# Altium PCB Main.PcbDoc
Units mil, origin at the board's own origin, x right, y up, seen from the top; angles counter-clockwise.
Board outline 3410 x 1181.1 mil, 2 copper layers (Top Layer, Bottom Layer); 19 components, 19 nets, 78 pads, 4 vias.
Unrouted connection lines stored in the file: 16.
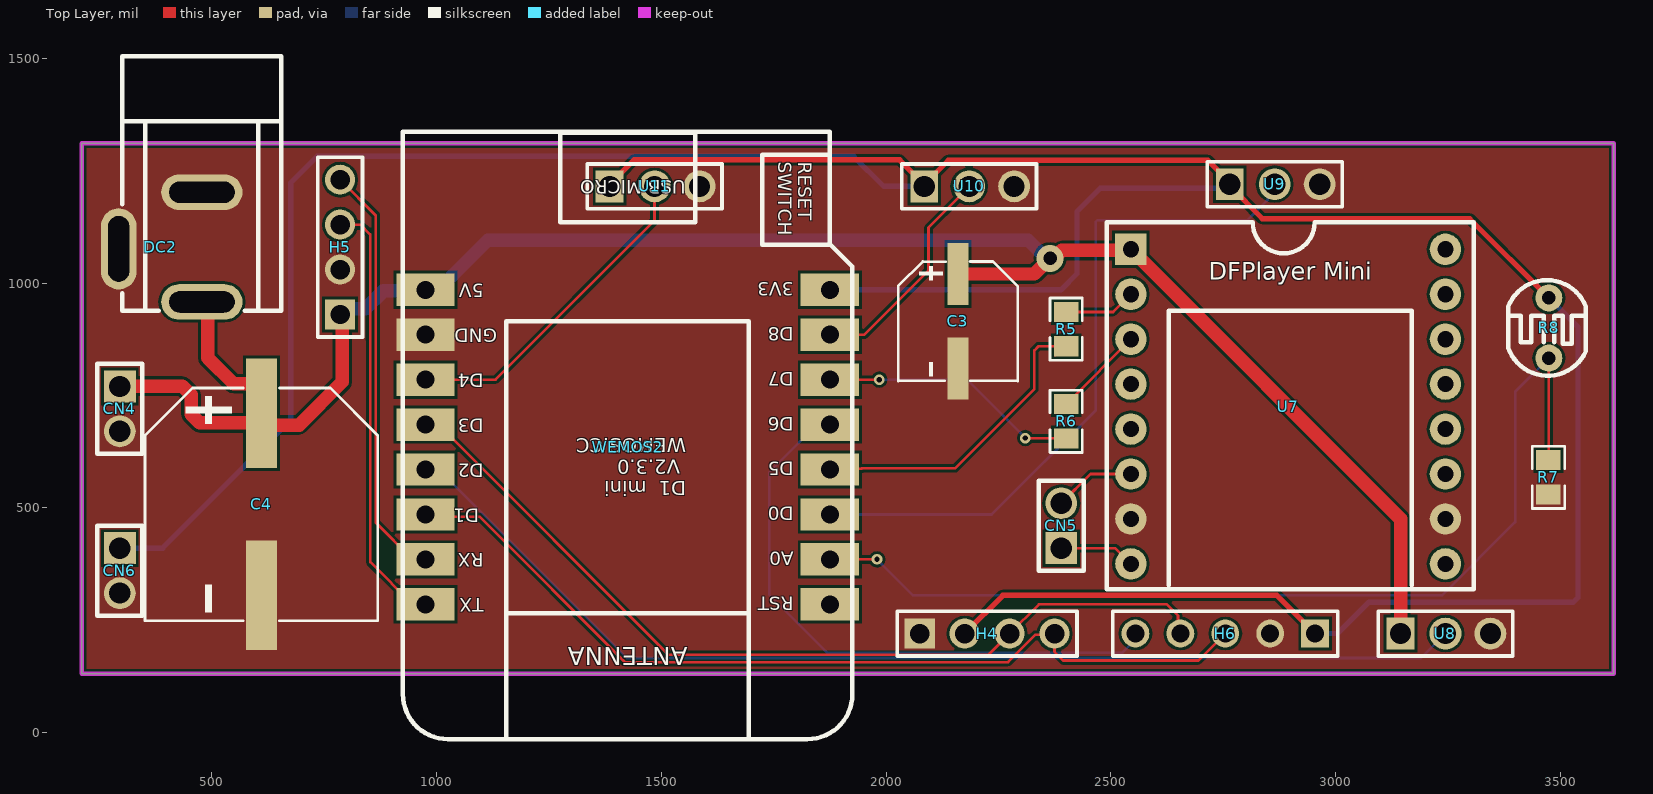
[diagram p0: Top Layer view]
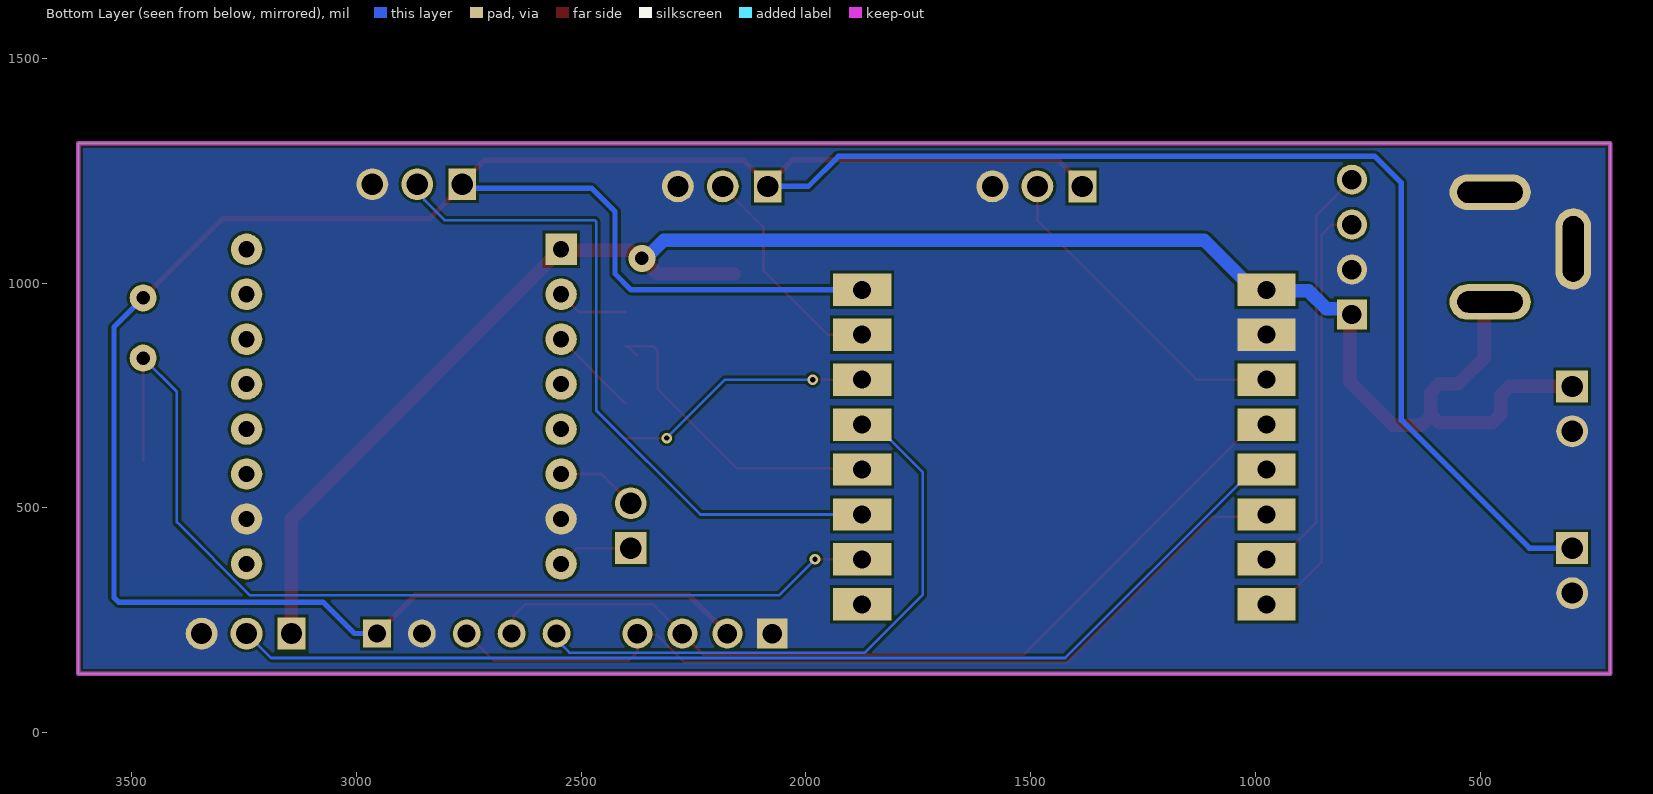
[diagram p1: Bottom Layer view, seen from below]

## Layer stack, top to bottom
Top Solder: solder mask 0.4, Solder Resist, Dk 3.5
Top Layer: signal copper 1.4
Dielectric 1: dielectric 12.6, FR-4, Dk 4.8
Bottom Layer: signal copper 1.4
Bottom Solder: solder mask 0.4, Solder Resist, Dk 3.5

## Board outline
210,130 210,1311.1 3620,1311.1 3620,130

## Design rules (kind name [scope] priority, off if disabled: settings)
Clearance [All] p1: gap=6 ignorepadtopadclearanceinfootprint=FALSE
HoleSize [All] p1: absolutevalues=TRUE maxlimit=150 minlimit=1 maxpercent=80.000 minpercent=20.000
PlaneClearance [All] p1: clearance=10
PlaneConnect [All] p1: planeconnectstyle=Direct reliefexpansion=20 reliefentries=4 reliefconductorwidth=10 reliefairgap=10
PolygonConnect [All] p1: connectstyle=Direct reliefconductorwidth=10 reliefentries=4 polygonreliefangle="90 Angle" airgapwidth=10
RoutingVias [All] p1: holewidth=19.68 width=39.37 viastyle="Through Hole" minholewidth=11.81 minwidth=23.62 maxholewidth=28 maxwidth=50
SilkToSilkClearance [All] p1: silktosilkclearance=2
SilkToSolderMaskClearance [IsPad] p1: minsilkscreentomaskgap=0 clearancetoexposedcopper=TRUE
SolderMaskExpansion [All] p1: expansion=4 istentingtop=FALSE
Width [All] p1: maxlimit=30 minlimit=6 preferedwidth=6
25 further rules are at their usual default settings.

## Classes and differential pairs
net class GND: GND

## Components (designator, comment, footprint, x,y, rotation, side; value= is the part's Value field where it differs from the comment)
C3 "100nF" CAP-SMD_BD6.3-L6.6-W6.6-LS7.2-FD 2160,915 r270 top
C4 "1000uF" 1000uf25v 323.09,812.17 r270 top
CN4 "5V输出" HDR-TH_2P-P2.54-V 295,720 r270 top
CN5 "喇叭1" HDR-TH_2P-P2.54-V 2390,460 r90 top
CN6 "3.3V输出" HDR-TH_2P-P2.54-V 295,360 r270 top
DC2 "总电源输入5V" DC-IN-TH_DC005 385,1080 r270 top
H4 "温湿度传感器" HDR-TH_4P-P2.54-V 2225,220 r0 top
H5 "树莓派" HDR-TH_4P-P2.54-V 785,1080 r90 top
H6 "手势感应" HDR-TH_5P-P2.54-V 2755,220 r180 top
R5 "1K" 0805_R 2375,895 r90 top
R6 "1K" 0805_R 2375,690 r90 top
R7 "1K" 0805_R 3500,570 r270 top
R8 "光敏GL5528" RES-TH_L5.1-W4.3-P3.40-D0.5 3475,900 r0 top
U7 "DFPlayer Mini" "DFPLAYER MINI" 2885,1135 r0 top
U8 "灯带矩阵8*32" HDR-TH_3P-P2.54-V 3245,220 r0 top
U9 "触摸按键1" HDR-TH_3P-P2.54-V 2865,1220 r0 top
U10 "触摸按键2" HDR-TH_3P-P2.54-V 2185,1215 r0 top
U11 "触摸按键3" HDR-TH_3P-P2.54-V 1485,1215 r0 top
WEMOS2 "WEMOS-D1-MINI" WEMOS_D1_MINI_V2.3.0 1425,635 r180 top

## Footprints (in the part's own frame and the unit in brackets; to place one, negate y for a bottom-side part, rotate by r counter-clockwise, add the part's x,y. Pads: shape width x height; smd on the part's side, far side on the other; paste and mask are expansions set on the pad)
0805_R [mil]
  rect 44.59x54.21 smd: 1(-35.71,-25.89) 2(40.38,-25.89)
  silkscreen extent -67,-62 72,10, body extent -39,-50 39,0, height 21
1000uf25v [mm]
  rect 6.2x1.75 smd: 1(2.592,7.287) 2(12.882,7.287)
  silkscreen extent 1.16,0.71 14.31,13.86, body extent 2.85,2.16 13.15,12.46, height 12.7
CAP-SMD_BD6.3-L6.6-W6.6-LS7.2-FD [mm]
  rect 3.5x1.2 smd: 1(-2.67,0) 2(2.67,0)
  silkscreen extent -3.38,-3.38 3.38,3.38, body extent -3.52,-3.3 3.78,3.3, height 5.9
DC-IN-TH_DC005 [mm]
  oval 2x4.6 hole 1.2 slot 3.7 at 90 deg: 1(3.1,2.35) 2(-3.1,2.35)
  oval 4.6x2 hole 1.2 slot 3.7 at 0 deg: 3(0.1,-2.35)
  silkscreen extent -10.8,-2.15 3.6,6.85
"DFPLAYER MINI" [mil]
  rect 70x70 hole 36: 1(-340,-60)
  round 70 hole 36: 2(-340,-160) 3(-340,-260) 4(-340,-360) 5(-340,-460) 6(-340,-560) 7(-340,-660) 8(-340,-760) 9(360,-760) 10(360,-660) 11(360,-560) 12(360,-460) 13(360,-360) 14(360,-260) 15(360,-160) 16(360,-60)
  silkscreen extent -394,-817 423,0, body extent -389,-820 410,0, height 335
HDR-TH_2P-P2.54-V [mm]
  rect 1.8x1.8 hole 1.2: 1(-1.27,0)
  round 1.8 hole 1.2: 2(1.27,0)
  silkscreen extent -2.54,-1.27 2.54,1.27, body extent -2.49,-1.27 2.59,1.27, height 8.54
HDR-TH_3P-P2.54-V [mm]
  rect 1.575x1.8 hole 1.2: 1(-2.54,0)
  round 1.8 hole 1.2: 2(0,0) 3(2.54,0)
  silkscreen extent -3.81,-1.27 3.81,1.27, body extent -3.81,-1.27 3.81,1.27, height 8
HDR-TH_4P-P2.54-V [mm]
  rect 1.7x1.7 hole 1.1: 1(-3.81,0)
  round 1.7 hole 1.1: 2(-1.27,0) 3(1.27,0) 4(3.81,0)
  silkscreen extent -5.08,-1.27 5.08,1.27, body extent -5.12,-1.26 5.04,1.28, height 9.39
HDR-TH_5P-P2.54-V [mil]
  rect 62x62 hole 40.16: 1(-200,0)
  round 62 hole 40.16: 2(-100,0) 3(0,0) 4(100,0) 5(200,0)
  silkscreen extent -250,-50 250,50, body extent -250,-49 250,51, height 398
RES-TH_L5.1-W4.3-P3.40-D0.5 [mil]
  round 60 hole 30: 1(0,66.93) 2(0,-66.93)
  silkscreen extent -91,-106 83,106
WEMOS_D1_MINI_V2.3.0 [mil]
  rect 129.6x72 hole 40: 3V3(-450,-350) 5V(450,-350) A0(-450,250) D0(-450,150) D1(450,150) D2(450,50) D3(450,-50) D4(450,-150) D5(-450,50) D6(-450,-50) D7(-450,-150) D8(-450,-250) GND(450,-250) RST(-450,350) RX(450,250) TX(450,350)
  silkscreen extent -500,-702 500,650, body extent -499,-410 499,410, height 335

## Part data
C3: BOM_Manufacturer="Taiyo Yuden", BOM_Manufacturer Part=UMK107B104KAHT, BOM_Supplier=LCSC, BOM_Supplier Part=C386152, Contributor=LCSC, nameAlias=Capacitance, spicePre=C, spiceSymbolName=UMK107B104KAHT
C4: BOM_Manufacturer=ValuePro, BOM_Manufacturer Part="1000uF 16V", BOM_Supplier=LCSC, BOM_Supplier Part=C43909, nameAlias=Capacitance, spicePre=C, spiceSymbolName="1000uF 16V"
CN4 CN5 CN6: BOM_Manufacturer="JST Sales America", BOM_Manufacturer Part=-, BOM_Supplier=LCSC, BOM_Supplier Part=C160332, Contributor=LCSC, spicePre=C, spiceSymbolName="RE-H022TD-1190 (LF)(SN)"
DC2: BOM_Manufacturer="Shenzhen Cankemeng", BOM_Manufacturer Part=-, BOM_Supplier=LCSC, BOM_Supplier Part=C132516, Contributor=LCSC, spicePre=D, spiceSymbolName="dc-005 5.5-2.0"
H4: library part i2C, BOM_Manufacturer=ZHENGLING, BOM_Manufacturer Part=Z-211-0411-0021-001, BOM_Supplier=LCSC, BOM_Supplier Part=C152150, Contributor=LCSC, spicePre=H, spiceSymbolName=Z-211-0411-0021-001
H5: BOM_Manufacturer=ZHENGLING, BOM_Manufacturer Part=Z-211-0411-0021-001, BOM_Supplier=LCSC, BOM_Supplier Part=C152150, Contributor=LCSC, spicePre=H, spiceSymbolName=Z-211-0411-0021-001
H6: BOM_Manufacturer="Amphenol ICC", BOM_Manufacturer Part=77311-462K05LF, BOM_Supplier=LCSC, BOM_Supplier Part=C180219, Contributor=LCSC, spicePre=H, spiceSymbolName=77311-462K05LF
R5 R6 R7: BOM_Manufacturer=TyoHM, BOM_Manufacturer Part="RN 1/8W 1K F T/B A1", BOM_Supplier=LCSC, BOM_Supplier Part=C433503, Contributor=LCSC, nameAlias="Resistance (Ohms)", spicePre=R, spiceSymbolName="RN 1/8W 1K F T/B A1"
R8: BOM_Manufacturer=Senba, BOM_Manufacturer Part=GL5528, BOM_Supplier=LCSC, BOM_Supplier Part=C125627, nameAlias=Value, spicePre=R, spiceSymbolName=GL5528
U8 U9 U10 U11: BOM_Manufacturer="JST Sales America", BOM_Manufacturer Part=RE-H032TD-1130, BOM_Supplier=LCSC, BOM_Supplier Part=C265013, Contributor=LCSC, spicePre=U, spiceSymbolName=RE-H032TD-1130
U7: Contributor=adrirobot, sourceId=cKDVP7pjB, spicePre=U, spiceSymbolName="DFPlayer Mini", timeStamp=1464108735
WEMOS2: spicePre=W, spiceSymbolName=WEMOS-D1-MINI

## Via types
v1: diameter 23.62, hole 11.81, Top Layer to Bottom Layer, tented both sides, 3 vias
v2: diameter 60, hole 30, Top Layer to Bottom Layer, tented both sides, 1 vias

## Nets (pads, with @x,y where several pads share a name; then routed paths per layer and width w, separated by ;. In a path a pad name is that pad's centre, name@x,y a point inside that pad or via, vN(x,y) a via of type N, cw(c..) or ccw(c..) an arc to the next point about the centre after c; other vN are vias at no path point)
3V3: CN6.1 H4.2 H6.1 R8.1 U9.1 U10.1 U11.1 WEMOS2.3V3 | length 8038.2
  Top Layer w12: U11.1 1385,1219.43 1439.59,1274.02 2030.41,1274.02 U10.1@2085,1219.43 ; U10.1 U10.1@2085,1219.43 ; H4.2 2260,305 2870,305 H6.1 ; R8.1 3298.84,1143.09 2837.47,1143.09 2765,1215.57 U9.1 2765,1224.43 2716.45,1272.98 2138.55,1272.98 U10.1@2085,1219.43
  Bottom Layer w12: CN6.1@295.17,410.17 390.17,410.17 675,695 675,1222.97 734.03,1282 1928,1282 1995,1215 U10.1 2090,1220 U10.1@2080,1230 ; WEMOS2.3V3 2389.29,985 2425,1020.71 2425,1159.09 2477.14,1211.23 2756.23,1211.23 U9.1 ; H6.1 3005,220 3075,290 3530,290 3540,300 3540,901.93 R8.1
+5: C3.1 C4.1 CN4.1 DC2.1 H5.1 U7.1 U8.1 WEMOS2.5V | length 4228.7
  Top Layer w30: CN4.1@300.29,770.8 434.2,770.8 453.39,751.61 453.39,707.77 472.57,688.58 590.55,688.58 C4.1@610,708.03 ; DC2.1 490.62,944.87 490.62,833.23 548.12,775.72 590.55,775.72 610,756.27 C4.1 C4.1@610,708.03 ; H5.1@790,900 790,780 693.95,683.95 629.45,683.95 610,703.4 C4.1@610,708.03 ; C3.1 2330.12,1020.12 v2(2365,1055) 2373.12,1055 2390.62,1072.5 2542.5,1072.5 U7.1 3145,475 U8.1
  Bottom Layer w30: H5.1@787.33,941.5 789.08,943.24 842.33,943.24 881.55,982.46 972.46,982.46 WEMOS2.5V 1003.8,985 1113.8,1095 2316.88,1095 2356.88,1055 v2(2365,1055)
BUTTON1: U9.2 WEMOS2.D0 | length 1580.4
  Top Layer w6: WEMOS2.D0@1846.2,485 WEMOS2.D0
  Bottom Layer w6: WEMOS2.D0 2235,485 2466.93,716.93 2466.93,1136.49 2470.44,1140 2804.47,1140 2849.32,1184.85 2849.32,1186.76 2865,1202.45 U9.2
BUTTON2: U10.2 WEMOS2.D8 | length 503.4
  Top Layer w6: WEMOS2.D8 1951.76,885 2094.75,1027.99 2094.75,1123.38 2185,1213.63 U10.2
BUTTON3: U11.2 WEMOS2.D4 | length 732.7
  Top Layer w6: WEMOS2.D4 1131.14,785 1485,1138.86 U11.2
DF_RX: R5.1 WEMOS2.D5 | length 722.1
  Top Layer w6: WEMOS2.D5 1876.76,586.76 1945.29,586.76 1946.08,587.55 2153.49,587.55 2330,764.06 2330,850 2339.29,859.29 R5.1 ; R5.1@2376.79,839.25 2376.79,840 2395.68,858.89 R5.1@2400.49,858.89
DF_TX: R6.1 WEMOS2.D7 | length 587.1
  Top Layer w6: WEMOS2.D7@1880,790 WEMOS2.D7 v1(1985,785) ; v1(2310,655) 2310.71,654.29 R6.1
  Bottom Layer w6: v1(1985,785) 2180,785 v1(2310,655)
GND: C3.2 C4.2 CN4.2 CN6.2 DC2.2 DC2.3 H4.1 H5.2 H6.2 R7.2 U7.7 U7.10 U8.3 U9.3 U10.3 U11.3 WEMOS2.GND
INT: H6.5 WEMOS2.D6 | length 1345.5
  Bottom Layer w6: WEMOS2.D6 1846.2,685 1813.2,652 1740,578.8 1740,306.47 1868.94,177.54 2526.49,177.54 2555,206.05 H6.5
LDR: R7.1 R8.2 WEMOS2.A0 | length 2249.7
  Top Layer w6: WEMOS2.A0 v1(1980,385) ; R7.1 3475,606.6 R8.2
  Bottom Layer w6: v1(1980,385) 2060,305 3237.23,305 3400,467.77 3400,758.07 R8.2
NetCN5_1: CN5.1 U7.8 | length 169.5
  Top Layer w6: CN5.1 2510,410 U7.8
NetCN5_2: CN5.2 U7.6 | length 181.9
  Top Layer w6: CN5.2 2455,575 U7.6
NetH5_3: H5.3 WEMOS2.TX | length 967.1
  Top Layer w6: H5.3 830.31,1130 851.92,1108.39 851.92,873.08 852.43,872.57 852.43,378.77 946.2,285 WEMOS2.TX
NetH5_4: H5.4 WEMOS2.RX | length 940.6
  Top Layer w6: H5.4 864.43,1150.57 864.43,955.57 864.43,466.77 946.2,385 WEMOS2.RX
NetR5_2: R5.2 U7.2 | length 160.5
  Top Layer w6: R5.2 2505.38,935.38 U7.2
NetR6_2: R6.2 U7.3 | length 204.2
  Top Layer w6: R6.2@2400.64,730.64 2406.87,736.87 U7.3
RGB_LED: U8.2 WEMOS2.D2 | length 2466.3
  Bottom Layer w6: WEMOS2.D2 1003.8,585 1423.26,165.54 3190.54,165.54 U8.2
SCL: H4.4 H6.3 WEMOS2.D1 | length 2016.3
  Top Layer w6: WEMOS2.D1 980,480 1095,480 1418.6,156.4 2271.45,156.4 2332.54,217.48 2372.48,217.48 H4.4 2375,178.74 2393.74,160 2695,160 H6.3
SDA: H4.3 H6.4 WEMOS2.D3 | length 1986.1
  Top Layer w6: WEMOS2.D3 1003.8,685 1516,172.8 2227.8,172.8 H4.3 2340,285 2625,285 2650,260 2650,225 H6.4
pads on no net: U7.4 U7.5 U7.9 U7.11 U7.12 U7.13 U7.14 U7.15 U7.16 WEMOS2.RST

## Polygon pours and split planes (outlines as drawn)
GND on Top Layer "GND_L01_P000" (solid, remove dead copper, pour order 0): 191.27,1343.68 194.95,1340 3675.05,1340 3675.05,90 3660.05,75 3645.05,90 175.05,90 175.05,1325 190.05,1340
GND on Bottom Layer "GND_L02_P001" (solid, remove dead copper, pour order 1): 196.27,1358.68 199.95,1355 3680.05,1355 3680.05,105 3665.05,90 3650.05,105 180.05,105 180.05,1340 195.05,1355

## Keep-outs
Keep-Out Layer:
  lines w10: 210,130 3620,130 3620,425.28 3620,1015.83 3620,1311.1 210,1311.1 210,130

## Silkscreen, mask and mechanical layers (free items; w line width, h text height)
Mechanical 1:
  the board outline again, w10

## Text inside footprints (layer, text, board x,y; h text height)
WEMOS2: Top Overlay "5V" at 1105,998.2 h30 r180; Top Overlay "USB MICRO" at 1554,1229 h30 r180; Top Overlay "GND" at 1135,898.2 h30 r180; Top Overlay "3V3" at 1795,1001.8 h30 r180; Top Overlay "D8" at 1795,901.8 h30 r180; Top Overlay "D3" at 1105,698.2 h30 r180; Top Overlay "D4" at 1105,798.2 h30 r180; Top Overlay "D1" at 1095,498.2 h30 r180; Top Overlay "D2" at 1105,598.2 h30 r180; Top Overlay "TX" at 1105,298.2 h30 r180; Top Overlay "RX" at 1105,398.2 h30 r180; Top Overlay "D0" at 1795,501.8 h30 r180; Top Overlay "D5" at 1795,601.8 h30 r180; Top Overlay "D7" at 1795,801.8 h30 r180; Top Overlay "D6" at 1795,701.8 h30 r180; Top Overlay "RST" at 1795,301.8 h30 r180; Top Overlay "A0" at 1795,401.8 h30 r180; Top Overlay "ANTENNA" at 1559,189 h40 r180; Top Overlay "D1  mini /  V2.3.0 / WEMOS.CC" at 1555,655 h32 r180; Top Overlay "RESET / SWITCH" at 1760,1270 h30 r270